# Altium PCB WorldClock.PcbDoc (part 9 of 13)
Units mil, origin at the board's own origin, x right, y up, seen from the top; angles counter-clockwise.
Board outline 3700 x 3850 mil, 2 copper layers (Top Layer, Bottom Layer); 227 components, 134 nets, 1324 pads, 248 vias.
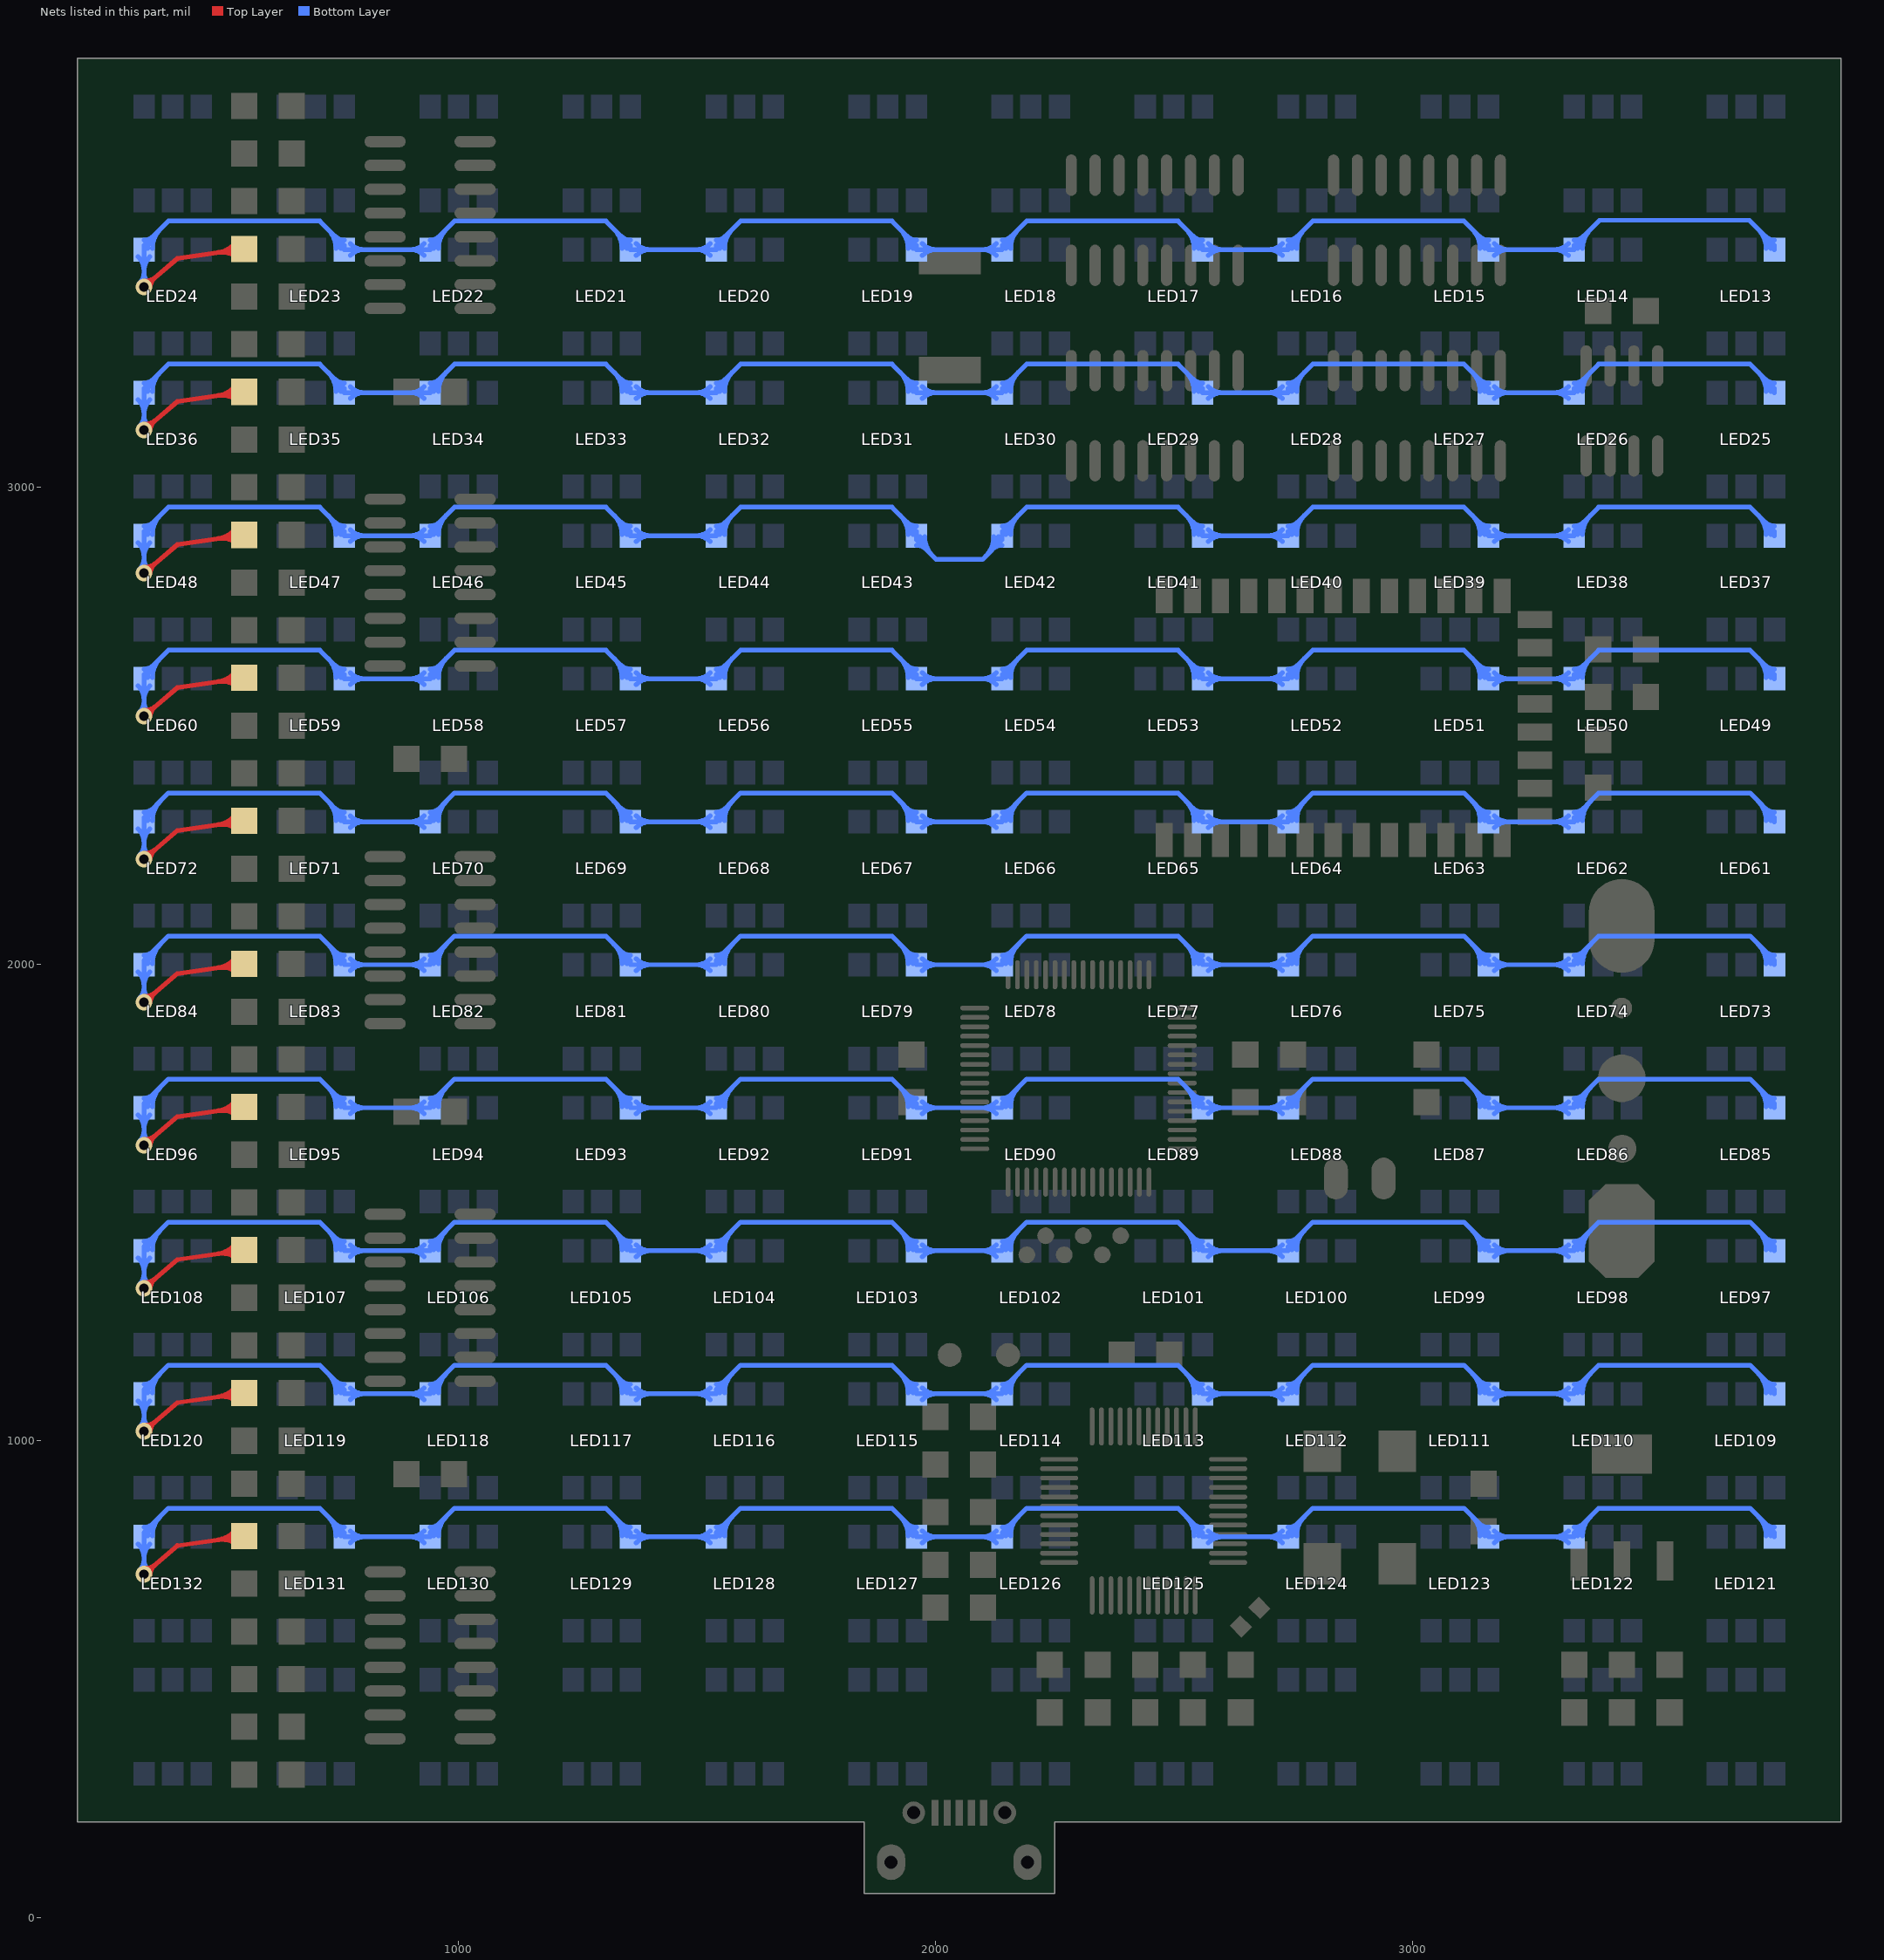
[diagram p9: the nets of this part, all layers, seen from the top]

## Via types
v1: diameter 35, hole 20, Top Layer to Bottom Layer, tented both sides, 213 vias
v2: diameter 24, hole 12, Top Layer to Bottom Layer, tented both sides, 35 vias

## Nets (pads, with @x,y where several pads share a name; then routed paths per layer and width w, separated by ;. In a path a pad name is that pad's centre, name@x,y a point inside that pad or via, vN(x,y) a via of type N, cw(c..) or ccw(c..) an arc to the next point about the centre after c; other vN are vias at no path point) (continued)
G2: LED13.3 LED14.1 LED15.3 LED16.1 LED17.3 LED18.1 LED19.3 LED20.1 LED21.3 LED22.1 LED23.3 LED24.1 R13.1 | length 6161.8
  Top Layer w10: v1@340.96,3432.46 ccw(c343.27,3462.55) 362.91,3439.64 ccw(c382.55,3416.73) v1@352.46,3419.04 ; v1@343,3420.5 v1(340,3420) 410,3480 R13.1@550,3500 ; R13.1@532,3513.5 cw(c488.54,3546.09) 496.23,3492.32 cw(c503.91,3438.54) R13.1@536.5,3482 ; R13.1@540,3507.5 cw(c515.86,3525.61) 520.13,3495.73 cw(c524.39,3465.86) R13.1@542.5,3490
  Bottom Layer w10: LED24.1@327.63,3483.55 cw(c297.75,3453.68) 340,3453.68 cw(c382.25,3453.68) LED24.1@352.37,3483.55 ; v1@331.16,3428.84 ccw(c309.82,3450.18) 340,3450.18 ccw(c370.18,3450.18) v1@348.84,3428.84 ; v1(340,3420) LED24.1@340,3498.43 340,3507.14 391.29,3558.43 708.71,3558.43 760,3507.14 LED23.3@760,3498.43 LED22.1@940,3498.43 940,3507.14 991.29,3558.43 1308.71,3558.43 1360,3507.14 LED21.3@1360,3498.43 LED20.1@1540,3498.43 1540,3507.14 1591.29,3558.43 1908.71,3558.43 1960,3507.14 LED19.3@1960,3498.43 LED18.1@2140,3498.43 2140,3507.14 2191.29,3558.43 2508.71,3558.43 2560,3507.14 LED17.3@2560,3498.43 LED16.1@2740,3498.43 2740,3507.14 2791.29,3558.43 3108.71,3558.43 3160,3507.14 LED15.3@3160,3498.43 LED14.1@3340,3498.43 3340,3507.14 3392.86,3560 3707.14,3560 3760,3507.14 LED13.3@3760,3498.43 ; LED24.1@340,3518.43 ccw(c340,3545.67) 359.27,3526.41 ; LED24.1@347.5,3500.93 cw(c380.61,3500.93) 357.2,3524.34 ; LED24.1@357.5,3500.93 cw(c414.75,3500.93) 374.27,3541.41 ; 725.73,3541.41 cw(c685.25,3500.93) LED23.3@742.5,3500.93 ; 740.73,3526.41 ccw(c760,3545.67) LED23.3@760,3518.43 ; 742.8,3524.34 cw(c719.39,3500.93) LED23.3@752.5,3500.93 ; LED23.3@772.37,3486.05 cw(c802.25,3456.18) 802.25,3498.43 cw(c802.25,3540.67) LED23.3@772.37,3510.8 ; LED22.1@927.63,3486.05 ccw(c897.75,3456.18) 897.75,3498.43 ccw(c897.75,3540.67) LED22.1@927.63,3510.8 ; LED22.1@940,3518.43 ccw(c940,3545.67) 959.27,3526.41 ; LED22.1@947.5,3500.93 cw(c980.61,3500.93) 957.2,3524.34 ; LED22.1@957.5,3500.93 cw(c1014.75,3500.93) 974.27,3541.41 ; 1325.73,3541.41 cw(c1285.25,3500.93) LED21.3@1342.5,3500.93 ; 1340.73,3526.41 ccw(c1360,3545.67) LED21.3@1360,3518.43 ; 1342.8,3524.34 cw(c1319.39,3500.93) LED21.3@1352.5,3500.93 ; LED21.3@1372.37,3486.05 cw(c1402.25,3456.18) 1402.25,3498.43 cw(c1402.25,3540.67) LED21.3@1372.37,3510.8 ; LED20.1@1527.63,3486.05 ccw(c1497.75,3456.18) 1497.75,3498.43 ccw(c1497.75,3540.67) LED20.1@1527.63,3510.8 ; LED20.1@1540,3518.43 ccw(c1540,3545.67) 1559.27,3526.41 ; LED20.1@1547.5,3500.93 cw(c1580.61,3500.93) 1557.2,3524.34 ; LED20.1@1557.5,3500.93 cw(c1614.75,3500.93) 1574.27,3541.41 ; 1925.73,3541.41 cw(c1885.25,3500.93) LED19.3@1942.5,3500.93 ; 1940.73,3526.41 ccw(c1960,3545.67) LED19.3@1960,3518.43 ; 1942.8,3524.34 cw(c1919.39,3500.93) LED19.3@1952.5,3500.93 ; LED19.3@1972.37,3486.05 cw(c2002.25,3456.18) 2002.25,3498.43 cw(c2002.25,3540.67) LED19.3@1972.37,3510.8 ; LED18.1@2127.63,3486.05 ccw(c2097.75,3456.18) 2097.75,3498.43 ccw(c2097.75,3540.67) LED18.1@2127.63,3510.8 ; LED18.1@2140,3518.43 ccw(c2140,3545.67) 2159.27,3526.41 ; LED18.1@2147.5,3500.93 cw(c2180.61,3500.93) 2157.2,3524.34 ; LED18.1@2157.5,3500.93 cw(c2214.75,3500.93) 2174.27,3541.41 ; 2525.73,3541.41 cw(c2485.25,3500.93) LED17.3@2542.5,3500.93 ; 2540.73,3526.41 ccw(c2560,3545.67) LED17.3@2560,3518.43 ; 2542.8,3524.34 cw(c2519.39,3500.93) LED17.3@2552.5,3500.93 ; LED17.3@2572.37,3486.05 cw(c2602.25,3456.18) 2602.25,3498.43 cw(c2602.25,3540.67) LED17.3@2572.37,3510.8 ; LED16.1@2727.63,3486.05 ccw(c2697.75,3456.18) 2697.75,3498.43 ccw(c2697.75,3540.67) LED16.1@2727.63,3510.8 ; LED16.1@2740,3518.43 ccw(c2740,3545.67) 2759.27,3526.41 ; LED16.1@2747.5,3500.93 cw(c2780.61,3500.93) 2757.2,3524.34 ; LED16.1@2757.5,3500.93 cw(c2814.75,3500.93) 2774.27,3541.41 ; 3125.73,3541.41 cw(c3085.25,3500.93) LED15.3@3142.5,3500.93 ; 3140.73,3526.41 ccw(c3160,3545.67) LED15.3@3160,3518.43 ; 3142.8,3524.34 cw(c3119.39,3500.93) LED15.3@3152.5,3500.93 ; LED15.3@3172.37,3486.05 cw(c3202.25,3456.18) 3202.25,3498.43 cw(c3202.25,3540.67) LED15.3@3172.37,3510.8 ; LED14.1@3327.63,3486.05 ccw(c3297.75,3456.18) 3297.75,3498.43 ccw(c3297.75,3540.67) LED14.1@3327.63,3510.8 ; LED14.1@3340,3518.43 ccw(c3340,3545.67) 3359.27,3526.41 ; LED14.1@3347.5,3500.93 cw(c3380.61,3500.93) 3357.2,3524.34 ; LED14.1@3357.5,3500.93 cw(c3414.75,3500.93) 3374.27,3541.41 ; 3725.73,3541.41 cw(c3685.25,3500.93) LED13.3@3742.5,3500.93 ; 3740.73,3526.41 ccw(c3760,3545.67) LED13.3@3760,3518.43 ; 3742.8,3524.34 cw(c3719.39,3500.93) LED13.3@3752.5,3500.93
G3: LED25.3 LED26.1 LED27.3 LED28.1 LED29.3 LED30.1 LED31.3 LED32.1 LED33.3 LED34.1 LED35.3 LED36.1 R16.1 | length 6157.5
  Top Layer w10: v1(340,3120) 410,3180 R16.1@550,3200 ; v1@340.96,3132.46 ccw(c343.27,3162.55) 362.91,3139.64 ccw(c382.55,3116.73) v1@352.46,3119.04 ; R16.1@532,3213.5 cw(c488.54,3246.09) 496.23,3192.32 cw(c503.91,3138.54) R16.1@536.5,3182 ; R16.1@540,3207.5 cw(c515.86,3225.61) 520.13,3195.73 cw(c524.39,3165.86) R16.1@542.5,3190
  Bottom Layer w10: LED36.1@327.63,3183.55 cw(c297.75,3153.68) 340,3153.68 cw(c382.25,3153.68) LED36.1@352.37,3183.55 ; v1@331.16,3128.84 ccw(c309.82,3150.18) 340,3150.18 ccw(c370.18,3150.18) v1@348.84,3128.84 ; v1(340,3120) LED36.1@340,3198.43 340,3207.14 391.29,3258.43 708.71,3258.43 760,3207.14 LED35.3@760,3198.43 LED34.1@940,3198.43 940,3207.14 991.29,3258.43 1308.71,3258.43 1360,3207.14 LED33.3@1360,3198.43 LED32.1@1540,3198.43 1540,3207.14 1591.29,3258.43 1908.71,3258.43 1960,3207.14 LED31.3@1960,3198.43 LED30.1@2140,3198.43 2140,3207.14 2191.29,3258.43 2508.71,3258.43 2560,3207.14 LED29.3@2560,3198.43 LED28.1@2740,3198.43 2740,3207.14 2791.29,3258.43 3108.71,3258.43 3160,3207.14 LED27.3@3160,3198.43 LED26.1@3340,3198.43 3340,3207.14 3391.29,3258.43 3708.71,3258.43 3760,3207.14 LED25.3@3760,3198.43 ; LED36.1@340,3218.43 ccw(c340,3245.67) 359.27,3226.41 ; LED36.1@347.5,3200.93 cw(c380.61,3200.93) 357.2,3224.34 ; LED36.1@357.5,3200.93 cw(c414.75,3200.93) 374.27,3241.41 ; 725.73,3241.41 cw(c685.25,3200.93) LED35.3@742.5,3200.93 ; 740.73,3226.41 ccw(c760,3245.67) LED35.3@760,3218.43 ; 742.8,3224.34 cw(c719.39,3200.93) LED35.3@752.5,3200.93 ; LED35.3@772.37,3186.05 cw(c802.25,3156.18) 802.25,3198.43 cw(c802.25,3240.67) LED35.3@772.37,3210.8 ; LED34.1@927.63,3186.05 ccw(c897.75,3156.18) 897.75,3198.43 ccw(c897.75,3240.67) LED34.1@927.63,3210.8 ; LED34.1@940,3218.43 ccw(c940,3245.67) 959.27,3226.41 ; LED34.1@947.5,3200.93 cw(c980.61,3200.93) 957.2,3224.34 ; LED34.1@957.5,3200.93 cw(c1014.75,3200.93) 974.27,3241.41 ; 1325.73,3241.41 cw(c1285.25,3200.93) LED33.3@1342.5,3200.93 ; 1340.73,3226.41 ccw(c1360,3245.67) LED33.3@1360,3218.43 ; 1342.8,3224.34 cw(c1319.39,3200.93) LED33.3@1352.5,3200.93 ; LED33.3@1372.37,3186.05 cw(c1402.25,3156.18) 1402.25,3198.43 cw(c1402.25,3240.67) LED33.3@1372.37,3210.8 ; LED32.1@1527.63,3186.05 ccw(c1497.75,3156.18) 1497.75,3198.43 ccw(c1497.75,3240.67) LED32.1@1527.63,3210.8 ; LED32.1@1540,3218.43 ccw(c1540,3245.67) 1559.27,3226.41 ; LED32.1@1547.5,3200.93 cw(c1580.61,3200.93) 1557.2,3224.34 ; LED32.1@1557.5,3200.93 cw(c1614.75,3200.93) 1574.27,3241.41 ; 1925.73,3241.41 cw(c1885.25,3200.93) LED31.3@1942.5,3200.93 ; 1940.73,3226.41 ccw(c1960,3245.67) LED31.3@1960,3218.43 ; 1942.8,3224.34 cw(c1919.39,3200.93) LED31.3@1952.5,3200.93 ; LED31.3@1972.37,3186.05 cw(c2002.25,3156.18) 2002.25,3198.43 cw(c2002.25,3240.67) LED31.3@1972.37,3210.8 ; LED30.1@2127.63,3186.05 ccw(c2097.75,3156.18) 2097.75,3198.43 ccw(c2097.75,3240.67) LED30.1@2127.63,3210.8 ; LED30.1@2140,3218.43 ccw(c2140,3245.67) 2159.27,3226.41 ; LED30.1@2147.5,3200.93 cw(c2180.61,3200.93) 2157.2,3224.34 ; LED30.1@2157.5,3200.93 cw(c2214.75,3200.93) 2174.27,3241.41 ; 2525.73,3241.41 cw(c2485.25,3200.93) LED29.3@2542.5,3200.93 ; 2540.73,3226.41 ccw(c2560,3245.67) LED29.3@2560,3218.43 ; 2542.8,3224.34 cw(c2519.39,3200.93) LED29.3@2552.5,3200.93 ; LED29.3@2572.37,3186.05 cw(c2602.25,3156.18) 2602.25,3198.43 cw(c2602.25,3240.67) LED29.3@2572.37,3210.8 ; LED28.1@2727.63,3186.05 ccw(c2697.75,3156.18) 2697.75,3198.43 ccw(c2697.75,3240.67) LED28.1@2727.63,3210.8 ; LED28.1@2740,3218.43 ccw(c2740,3245.67) 2759.27,3226.41 ; LED28.1@2747.5,3200.93 cw(c2780.61,3200.93) 2757.2,3224.34 ; LED28.1@2757.5,3200.93 cw(c2814.75,3200.93) 2774.27,3241.41 ; 3125.73,3241.41 cw(c3085.25,3200.93) LED27.3@3142.5,3200.93 ; 3140.73,3226.41 ccw(c3160,3245.67) LED27.3@3160,3218.43 ; 3142.8,3224.34 cw(c3119.39,3200.93) LED27.3@3152.5,3200.93 ; LED27.3@3172.37,3186.05 cw(c3202.25,3156.18) 3202.25,3198.43 cw(c3202.25,3240.67) LED27.3@3172.37,3210.8 ; LED26.1@3327.63,3186.05 ccw(c3297.75,3156.18) 3297.75,3198.43 ccw(c3297.75,3240.67) LED26.1@3327.63,3210.8 ; LED26.1@3340,3218.43 ccw(c3340,3245.67) 3359.27,3226.41 ; LED26.1@3347.5,3200.93 cw(c3380.61,3200.93) 3357.2,3224.34 ; LED26.1@3357.5,3200.93 cw(c3414.75,3200.93) 3374.27,3241.41 ; 3725.73,3241.41 cw(c3685.25,3200.93) LED25.3@3742.5,3200.93 ; 3740.73,3226.41 ccw(c3760,3245.67) LED25.3@3760,3218.43 ; 3742.8,3224.34 cw(c3719.39,3200.93) LED25.3@3752.5,3200.93
G4: LED37.3 LED38.1 LED39.3 LED40.1 LED41.3 LED42.1 LED43.3 LED44.1 LED45.3 LED46.1 LED47.3 LED48.1 R18.1 | length 6259.7
  Top Layer w10: v1(340,2820) 410,2880 R18.1@550,2900 ; v1@340.96,2832.46 ccw(c343.27,2862.55) 362.91,2839.64 ccw(c382.55,2816.73) v1@352.46,2819.04 ; R18.1@532,2913.5 cw(c488.54,2946.09) 496.23,2892.32 cw(c503.91,2838.54) R18.1@536.5,2882 ; R18.1@540,2907.5 cw(c515.86,2925.61) 520.13,2895.73 cw(c524.39,2865.86) R18.1@542.5,2890
  Bottom Layer w10: LED48.1@327.63,2883.55 cw(c297.75,2853.68) 340,2853.68 cw(c382.25,2853.68) LED48.1@352.37,2883.55 ; v1@331.16,2828.84 ccw(c309.82,2850.18) 340,2850.18 ccw(c370.18,2850.18) v1@348.84,2828.84 ; v1(340,2820) LED48.1@340,2898.43 340,2907.14 391.29,2958.43 708.71,2958.43 760,2907.14 LED47.3@760,2898.43 LED46.1@940,2898.43 940,2907.14 991.29,2958.43 1308.71,2958.43 1360,2907.14 LED45.3@1360,2898.43 LED44.1@1540,2898.43 1540,2907.14 1591.29,2958.43 1908.71,2958.43 1960,2907.14 LED43.3@1960,2898.43 1960,2890 2001.57,2848.43 2098.43,2848.43 2140,2890 LED42.1@2140,2898.43 2140,2907.14 2191.29,2958.43 2508.71,2958.43 2560,2907.14 LED41.3@2560,2898.43 LED40.1@2740,2898.43 2740,2907.14 2791.29,2958.43 3108.71,2958.43 3160,2907.14 LED39.3@3160,2898.43 LED38.1@3340,2898.43 3340,2907.14 3391.29,2958.43 3708.71,2958.43 3760,2907.14 LED37.3@3760,2898.43 ; LED48.1@340,2918.43 ccw(c340,2945.67) 359.27,2926.41 ; LED48.1@347.5,2900.93 cw(c380.61,2900.93) 357.2,2924.34 ; LED48.1@357.5,2900.93 cw(c414.75,2900.93) 374.27,2941.41 ; 725.73,2941.41 cw(c685.25,2900.93) LED47.3@742.5,2900.93 ; 740.73,2926.41 ccw(c760,2945.67) LED47.3@760,2918.43 ; 742.8,2924.34 cw(c719.39,2900.93) LED47.3@752.5,2900.93 ; LED47.3@772.37,2886.05 cw(c802.25,2856.18) 802.25,2898.43 cw(c802.25,2940.67) LED47.3@772.37,2910.8 ; LED46.1@927.63,2886.05 ccw(c897.75,2856.18) 897.75,2898.43 ccw(c897.75,2940.67) LED46.1@927.63,2910.8 ; LED46.1@940,2918.43 ccw(c940,2945.67) 959.27,2926.41 ; LED46.1@947.5,2900.93 cw(c980.61,2900.93) 957.2,2924.34 ; LED46.1@957.5,2900.93 cw(c1014.75,2900.93) 974.27,2941.41 ; 1325.73,2941.41 cw(c1285.25,2900.93) LED45.3@1342.5,2900.93 ; 1340.73,2926.41 ccw(c1360,2945.67) LED45.3@1360,2918.43 ; 1342.8,2924.34 cw(c1319.39,2900.93) LED45.3@1352.5,2900.93 ; LED45.3@1372.37,2886.05 cw(c1402.25,2856.18) 1402.25,2898.43 cw(c1402.25,2940.67) LED45.3@1372.37,2910.8 ; LED44.1@1527.63,2886.05 ccw(c1497.75,2856.18) 1497.75,2898.43 ccw(c1497.75,2940.67) LED44.1@1527.63,2910.8 ; LED44.1@1540,2918.43 ccw(c1540,2945.67) 1559.27,2926.41 ; LED44.1@1547.5,2900.93 cw(c1580.61,2900.93) 1557.2,2924.34 ; LED44.1@1557.5,2900.93 cw(c1614.75,2900.93) 1574.27,2941.41 ; 1925.73,2941.41 cw(c1885.25,2900.93) LED43.3@1942.5,2900.93 ; 1940.73,2926.41 ccw(c1960,2945.67) LED43.3@1960,2918.43 ; 1942.8,2924.34 cw(c1919.39,2900.93) LED43.3@1952.5,2900.93 ; LED43.3@1960,2878.43 cw(c1960,2850.48) 1979.76,2870.24 ; LED43.3@1967.5,2895.93 ccw(c1999.91,2895.93) 1976.99,2873.01 ; LED43.3@1977.5,2895.93 ccw(c2034.05,2895.93) 1994.06,2855.94 ; 2105.94,2855.94 ccw(c2065.95,2895.93) LED42.1@2122.5,2895.93 ; 2120.24,2870.24 cw(c2140,2850.48) LED42.1@2140,2878.43 ; 2123.01,2873.01 ccw(c2100.09,2895.93) LED42.1@2132.5,2895.93 ; LED42.1@2140,2918.43 ccw(c2140,2945.67) 2159.27,2926.41 ; LED42.1@2147.5,2900.93 cw(c2180.61,2900.93) 2157.2,2924.34 ; LED42.1@2157.5,2900.93 cw(c2214.75,2900.93) 2174.27,2941.41 ; 2525.73,2941.41 cw(c2485.25,2900.93) LED41.3@2542.5,2900.93 ; 2540.73,2926.41 ccw(c2560,2945.67) LED41.3@2560,2918.43 ; 2542.8,2924.34 cw(c2519.39,2900.93) LED41.3@2552.5,2900.93 ; LED41.3@2572.37,2886.05 cw(c2602.25,2856.18) 2602.25,2898.43 cw(c2602.25,2940.67) LED41.3@2572.37,2910.8 ; LED40.1@2727.63,2886.05 ccw(c2697.75,2856.18) 2697.75,2898.43 ccw(c2697.75,2940.67) LED40.1@2727.63,2910.8 ; LED40.1@2740,2918.43 ccw(c2740,2945.67) 2759.27,2926.41 ; LED40.1@2747.5,2900.93 cw(c2780.61,2900.93) 2757.2,2924.34 ; LED40.1@2757.5,2900.93 cw(c2814.75,2900.93) 2774.27,2941.41 ; 3125.73,2941.41 cw(c3085.25,2900.93) LED39.3@3142.5,2900.93 ; 3140.73,2926.41 ccw(c3160,2945.67) LED39.3@3160,2918.43 ; 3142.8,2924.34 cw(c3119.39,2900.93) LED39.3@3152.5,2900.93 ; LED39.3@3172.37,2886.05 cw(c3202.25,2856.18) 3202.25,2898.43 cw(c3202.25,2940.67) LED39.3@3172.37,2910.8 ; LED38.1@3327.63,2886.05 ccw(c3297.75,2856.18) 3297.75,2898.43 ccw(c3297.75,2940.67) LED38.1@3327.63,2910.8 ; LED38.1@3340,2918.43 ccw(c3340,2945.67) 3359.27,2926.41 ; LED38.1@3347.5,2900.93 cw(c3380.61,2900.93) 3357.2,2924.34 ; LED38.1@3357.5,2900.93 cw(c3414.75,2900.93) 3374.27,2941.41 ; 3725.73,2941.41 cw(c3685.25,2900.93) LED37.3@3742.5,2900.93 ; 3740.73,2926.41 ccw(c3760,2945.67) LED37.3@3760,2918.43 ; 3742.8,2924.34 cw(c3719.39,2900.93) LED37.3@3752.5,2900.93
G5: LED49.3 LED50.1 LED51.3 LED52.1 LED53.3 LED54.1 LED55.3 LED56.1 LED57.3 LED58.1 LED59.3 LED60.1 R22.1 | length 6157.5
  Top Layer w10: v1(340,2520) 410,2580 R22.1@550,2600 ; v1@340.96,2532.46 ccw(c343.27,2562.55) 362.91,2539.64 ccw(c382.55,2516.73) v1@352.46,2519.04 ; R22.1@532,2613.5 cw(c488.54,2646.09) 496.23,2592.32 cw(c503.91,2538.54) R22.1@536.5,2582 ; R22.1@540,2607.5 cw(c515.86,2625.61) 520.13,2595.73 cw(c524.39,2565.86) R22.1@542.5,2590
  Bottom Layer w10: LED60.1@327.63,2583.55 cw(c297.75,2553.68) 340,2553.68 cw(c382.25,2553.68) LED60.1@352.37,2583.55 ; v1@331.16,2528.84 ccw(c309.82,2550.18) 340,2550.18 ccw(c370.18,2550.18) v1@348.84,2528.84 ; v1(340,2520) LED60.1@340,2598.43 340,2607.14 391.29,2658.43 708.71,2658.43 760,2607.14 LED59.3@760,2598.43 LED58.1@940,2598.43 940,2607.14 991.29,2658.43 1308.71,2658.43 1360,2607.14 LED57.3@1360,2598.43 LED56.1@1540,2598.43 1540,2607.14 1591.29,2658.43 1908.71,2658.43 1960,2607.14 LED55.3@1960,2598.43 LED54.1@2140,2598.43 2140,2607.14 2191.29,2658.43 2508.71,2658.43 2560,2607.14 LED53.3@2560,2598.43 LED52.1@2740,2598.43 2740,2607.14 2791.29,2658.43 3108.71,2658.43 3160,2607.14 LED51.3@3160,2598.43 LED50.1@3340,2598.43 3340,2607.14 3391.29,2658.43 3708.71,2658.43 3760,2607.14 LED49.3@3760,2598.43 ; LED60.1@340,2618.43 ccw(c340,2645.67) 359.27,2626.41 ; LED60.1@347.5,2600.93 cw(c380.61,2600.93) 357.2,2624.34 ; LED60.1@357.5,2600.93 cw(c414.75,2600.93) 374.27,2641.41 ; 725.73,2641.41 cw(c685.25,2600.93) LED59.3@742.5,2600.93 ; 740.73,2626.41 ccw(c760,2645.67) LED59.3@760,2618.43 ; 742.8,2624.34 cw(c719.39,2600.93) LED59.3@752.5,2600.93 ; LED59.3@772.37,2586.05 cw(c802.25,2556.18) 802.25,2598.43 cw(c802.25,2640.67) LED59.3@772.37,2610.8 ; LED58.1@927.63,2586.05 ccw(c897.75,2556.18) 897.75,2598.43 ccw(c897.75,2640.67) LED58.1@927.63,2610.8 ; LED58.1@940,2618.43 ccw(c940,2645.67) 959.27,2626.41 ; LED58.1@947.5,2600.93 cw(c980.61,2600.93) 957.2,2624.34 ; LED58.1@957.5,2600.93 cw(c1014.75,2600.93) 974.27,2641.41 ; 1325.73,2641.41 cw(c1285.25,2600.93) LED57.3@1342.5,2600.93 ; 1340.73,2626.41 ccw(c1360,2645.67) LED57.3@1360,2618.43 ; 1342.8,2624.34 cw(c1319.39,2600.93) LED57.3@1352.5,2600.93 ; LED57.3@1372.37,2586.05 cw(c1402.25,2556.18) 1402.25,2598.43 cw(c1402.25,2640.67) LED57.3@1372.37,2610.8 ; LED56.1@1527.63,2586.05 ccw(c1497.75,2556.18) 1497.75,2598.43 ccw(c1497.75,2640.67) LED56.1@1527.63,2610.8 ; LED56.1@1540,2618.43 ccw(c1540,2645.67) 1559.27,2626.41 ; LED56.1@1547.5,2600.93 cw(c1580.61,2600.93) 1557.2,2624.34 ; LED56.1@1557.5,2600.93 cw(c1614.75,2600.93) 1574.27,2641.41 ; 1925.73,2641.41 cw(c1885.25,2600.93) LED55.3@1942.5,2600.93 ; 1940.73,2626.41 ccw(c1960,2645.67) LED55.3@1960,2618.43 ; 1942.8,2624.34 cw(c1919.39,2600.93) LED55.3@1952.5,2600.93 ; LED55.3@1972.37,2586.05 cw(c2002.25,2556.18) 2002.25,2598.43 cw(c2002.25,2640.67) LED55.3@1972.37,2610.8 ; LED54.1@2127.63,2586.05 ccw(c2097.75,2556.18) 2097.75,2598.43 ccw(c2097.75,2640.67) LED54.1@2127.63,2610.8 ; LED54.1@2140,2618.43 ccw(c2140,2645.67) 2159.27,2626.41 ; LED54.1@2147.5,2600.93 cw(c2180.61,2600.93) 2157.2,2624.34 ; LED54.1@2157.5,2600.93 cw(c2214.75,2600.93) 2174.27,2641.41 ; 2525.73,2641.41 cw(c2485.25,2600.93) LED53.3@2542.5,2600.93 ; 2540.73,2626.41 ccw(c2560,2645.67) LED53.3@2560,2618.43 ; 2542.8,2624.34 cw(c2519.39,2600.93) LED53.3@2552.5,2600.93 ; LED53.3@2572.37,2586.05 cw(c2602.25,2556.18) 2602.25,2598.43 cw(c2602.25,2640.67) LED53.3@2572.37,2610.8 ; LED52.1@2727.63,2586.05 ccw(c2697.75,2556.18) 2697.75,2598.43 ccw(c2697.75,2640.67) LED52.1@2727.63,2610.8 ; LED52.1@2740,2618.43 ccw(c2740,2645.67) 2759.27,2626.41 ; LED52.1@2747.5,2600.93 cw(c2780.61,2600.93) 2757.2,2624.34 ; LED52.1@2757.5,2600.93 cw(c2814.75,2600.93) 2774.27,2641.41 ; 3125.73,2641.41 cw(c3085.25,2600.93) LED51.3@3142.5,2600.93 ; 3140.73,2626.41 ccw(c3160,2645.67) LED51.3@3160,2618.43 ; 3142.8,2624.34 cw(c3119.39,2600.93) LED51.3@3152.5,2600.93 ; LED51.3@3172.37,2586.05 cw(c3202.25,2556.18) 3202.25,2598.43 cw(c3202.25,2640.67) LED51.3@3172.37,2610.8 ; LED50.1@3327.63,2586.05 ccw(c3297.75,2556.18) 3297.75,2598.43 ccw(c3297.75,2640.67) LED50.1@3327.63,2610.8 ; LED50.1@3340,2618.43 ccw(c3340,2645.67) 3359.27,2626.41 ; LED50.1@3347.5,2600.93 cw(c3380.61,2600.93) 3357.2,2624.34 ; LED50.1@3357.5,2600.93 cw(c3414.75,2600.93) 3374.27,2641.41 ; 3725.73,2641.41 cw(c3685.25,2600.93) LED49.3@3742.5,2600.93 ; 3740.73,2626.41 ccw(c3760,2645.67) LED49.3@3760,2618.43 ; 3742.8,2624.34 cw(c3719.39,2600.93) LED49.3@3752.5,2600.93
G6: LED61.3 LED62.1 LED63.3 LED64.1 LED65.3 LED66.1 LED67.3 LED68.1 LED69.3 LED70.1 LED71.3 LED72.1 R25.1 | length 6157.5
  Top Layer w10: v1(340,2220) 410,2280 R25.1@550,2300 ; v1@340.96,2232.46 ccw(c343.27,2262.55) 362.91,2239.64 ccw(c382.55,2216.73) v1@352.46,2219.04 ; R25.1@532,2313.5 cw(c488.54,2346.09) 496.23,2292.32 cw(c503.91,2238.54) R25.1@536.5,2282 ; R25.1@540,2307.5 cw(c515.86,2325.61) 520.13,2295.73 cw(c524.39,2265.86) R25.1@542.5,2290
  Bottom Layer w10: LED72.1@327.63,2283.55 cw(c297.75,2253.68) 340,2253.68 cw(c382.25,2253.68) LED72.1@352.37,2283.55 ; v1@331.16,2228.84 ccw(c309.82,2250.18) 340,2250.18 ccw(c370.18,2250.18) v1@348.84,2228.84 ; v1(340,2220) LED72.1@340,2298.43 340,2307.14 391.29,2358.43 708.71,2358.43 760,2307.14 LED71.3@760,2298.43 LED70.1@940,2298.43 940,2307.14 991.29,2358.43 1308.71,2358.43 1360,2307.14 LED69.3@1360,2298.43 LED68.1@1540,2298.43 1540,2307.14 1591.29,2358.43 1908.71,2358.43 1960,2307.14 LED67.3@1960,2298.43 LED66.1@2140,2298.43 2140,2307.14 2191.29,2358.43 2508.71,2358.43 2560,2307.14 LED65.3@2560,2298.43 LED64.1@2740,2298.43 2740,2307.14 2791.29,2358.43 3108.71,2358.43 3160,2307.14 LED63.3@3160,2298.43 LED62.1@3340,2298.43 3340,2307.14 3391.29,2358.43 3708.71,2358.43 3760,2307.14 LED61.3@3760,2298.43 ; LED72.1@340,2318.43 ccw(c340,2345.67) 359.27,2326.41 ; LED72.1@347.5,2300.93 cw(c380.61,2300.93) 357.2,2324.34 ; LED72.1@357.5,2300.93 cw(c414.75,2300.93) 374.27,2341.41 ; 725.73,2341.41 cw(c685.25,2300.93) LED71.3@742.5,2300.93 ; 740.73,2326.41 ccw(c760,2345.67) LED71.3@760,2318.43 ; 742.8,2324.34 cw(c719.39,2300.93) LED71.3@752.5,2300.93 ; LED71.3@772.37,2286.05 cw(c802.25,2256.18) 802.25,2298.43 cw(c802.25,2340.67) LED71.3@772.37,2310.8 ; LED70.1@927.63,2286.05 ccw(c897.75,2256.18) 897.75,2298.43 ccw(c897.75,2340.67) LED70.1@927.63,2310.8 ; LED70.1@940,2318.43 ccw(c940,2345.67) 959.27,2326.41 ; LED70.1@947.5,2300.93 cw(c980.61,2300.93) 957.2,2324.34 ; LED70.1@957.5,2300.93 cw(c1014.75,2300.93) 974.27,2341.41 ; 1325.73,2341.41 cw(c1285.25,2300.93) LED69.3@1342.5,2300.93 ; 1340.73,2326.41 ccw(c1360,2345.67) LED69.3@1360,2318.43 ; 1342.8,2324.34 cw(c1319.39,2300.93) LED69.3@1352.5,2300.93 ; LED69.3@1372.37,2286.05 cw(c1402.25,2256.18) 1402.25,2298.43 cw(c1402.25,2340.67) LED69.3@1372.37,2310.8 ; LED68.1@1527.63,2286.05 ccw(c1497.75,2256.18) 1497.75,2298.43 ccw(c1497.75,2340.67) LED68.1@1527.63,2310.8 ; LED68.1@1540,2318.43 ccw(c1540,2345.67) 1559.27,2326.41 ; LED68.1@1547.5,2300.93 cw(c1580.61,2300.93) 1557.2,2324.34 ; LED68.1@1557.5,2300.93 cw(c1614.75,2300.93) 1574.27,2341.41 ; 1925.73,2341.41 cw(c1885.25,2300.93) LED67.3@1942.5,2300.93 ; 1940.73,2326.41 ccw(c1960,2345.67) LED67.3@1960,2318.43 ; 1942.8,2324.34 cw(c1919.39,2300.93) LED67.3@1952.5,2300.93 ; LED67.3@1972.37,2286.05 cw(c2002.25,2256.18) 2002.25,2298.43 cw(c2002.25,2340.67) LED67.3@1972.37,2310.8 ; LED66.1@2127.63,2286.05 ccw(c2097.75,2256.18) 2097.75,2298.43 ccw(c2097.75,2340.67) LED66.1@2127.63,2310.8 ; LED66.1@2140,2318.43 ccw(c2140,2345.67) 2159.27,2326.41 ; LED66.1@2147.5,2300.93 cw(c2180.61,2300.93) 2157.2,2324.34 ; LED66.1@2157.5,2300.93 cw(c2214.75,2300.93) 2174.27,2341.41 ; 2525.73,2341.41 cw(c2485.25,2300.93) LED65.3@2542.5,2300.93 ; 2540.73,2326.41 ccw(c2560,2345.67) LED65.3@2560,2318.43 ; 2542.8,2324.34 cw(c2519.39,2300.93) LED65.3@2552.5,2300.93 ; LED65.3@2572.37,2286.05 cw(c2602.25,2256.18) 2602.25,2298.43 cw(c2602.25,2340.67) LED65.3@2572.37,2310.8 ; LED64.1@2727.63,2286.05 ccw(c2697.75,2256.18) 2697.75,2298.43 ccw(c2697.75,2340.67) LED64.1@2727.63,2310.8 ; LED64.1@2740,2318.43 ccw(c2740,2345.67) 2759.27,2326.41 ; LED64.1@2747.5,2300.93 cw(c2780.61,2300.93) 2757.2,2324.34 ; LED64.1@2757.5,2300.93 cw(c2814.75,2300.93) 2774.27,2341.41 ; 3125.73,2341.41 cw(c3085.25,2300.93) LED63.3@3142.5,2300.93 ; 3140.73,2326.41 ccw(c3160,2345.67) LED63.3@3160,2318.43 ; 3142.8,2324.34 cw(c3119.39,2300.93) LED63.3@3152.5,2300.93 ; LED63.3@3172.37,2286.05 cw(c3202.25,2256.18) 3202.25,2298.43 cw(c3202.25,2340.67) LED63.3@3172.37,2310.8 ; LED62.1@3327.63,2286.05 ccw(c3297.75,2256.18) 3297.75,2298.43 ccw(c3297.75,2340.67) LED62.1@3327.63,2310.8 ; LED62.1@3340,2318.43 ccw(c3340,2345.67) 3359.27,2326.41 ; LED62.1@3347.5,2300.93 cw(c3380.61,2300.93) 3357.2,2324.34 ; LED62.1@3357.5,2300.93 cw(c3414.75,2300.93) 3374.27,2341.41 ; 3725.73,2341.41 cw(c3685.25,2300.93) LED61.3@3742.5,2300.93 ; 3740.73,2326.41 ccw(c3760,2345.67) LED61.3@3760,2318.43 ; 3742.8,2324.34 cw(c3719.39,2300.93) LED61.3@3752.5,2300.93
G7: LED73.3 LED74.1 LED75.3 LED76.1 LED77.3 LED78.1 LED79.3 LED80.1 LED81.3 LED82.1 LED83.3 LED84.1 R27.1 | length 6157.5
  Top Layer w10: v1(340,1920) 410,1980 R27.1@550,2000 ; v1@340.96,1932.46 ccw(c343.27,1962.55) 362.91,1939.64 ccw(c382.55,1916.73) v1@352.46,1919.04 ; R27.1@532,2013.5 cw(c488.54,2046.09) 496.23,1992.32 cw(c503.91,1938.54) R27.1@536.5,1982 ; R27.1@540,2007.5 cw(c515.86,2025.61) 520.13,1995.73 cw(c524.39,1965.86) R27.1@542.5,1990
  Bottom Layer w10: LED84.1@327.63,1983.55 cw(c297.75,1953.68) 340,1953.68 cw(c382.25,1953.68) LED84.1@352.37,1983.55 ; v1@331.16,1928.84 ccw(c309.82,1950.18) 340,1950.18 ccw(c370.18,1950.18) v1@348.84,1928.84 ; v1(340,1920) LED84.1@340,1998.43 340,2007.14 391.29,2058.43 708.71,2058.43 760,2007.14 LED83.3@760,1998.43 LED82.1@940,1998.43 940,2007.14 991.29,2058.43 1308.71,2058.43 1360,2007.14 LED81.3@1360,1998.43 LED80.1@1540,1998.43 1540,2007.14 1591.29,2058.43 1908.71,2058.43 1960,2007.14 LED79.3@1960,1998.43 LED78.1@2140,1998.43 2140,2007.14 2191.29,2058.43 2508.71,2058.43 2560,2007.14 LED77.3@2560,1998.43 LED76.1@2740,1998.43 2740,2007.14 2791.29,2058.43 3108.71,2058.43 3160,2007.14 LED75.3@3160,1998.43 LED74.1@3340,1998.43 3340,2007.14 3391.29,2058.43 3708.71,2058.43 3760,2007.14 LED73.3@3760,1998.43 ; LED84.1@340,2018.43 ccw(c340,2045.67) 359.27,2026.41 ; LED84.1@347.5,2000.93 cw(c380.61,2000.93) 357.2,2024.34 ; LED84.1@357.5,2000.93 cw(c414.75,2000.93) 374.27,2041.41 ; 725.73,2041.41 cw(c685.25,2000.93) LED83.3@742.5,2000.93 ; 740.73,2026.41 ccw(c760,2045.67) LED83.3@760,2018.43 ; 742.8,2024.34 cw(c719.39,2000.93) LED83.3@752.5,2000.93 ; LED83.3@772.37,1986.05 cw(c802.25,1956.18) 802.25,1998.43 cw(c802.25,2040.67) LED83.3@772.37,2010.8 ; LED82.1@927.63,1986.05 ccw(c897.75,1956.18) 897.75,1998.43 ccw(c897.75,2040.67) LED82.1@927.63,2010.8 ; LED82.1@940,2018.43 ccw(c940,2045.67) 959.27,2026.41 ; LED82.1@947.5,2000.93 cw(c980.61,2000.93) 957.2,2024.34 ; LED82.1@957.5,2000.93 cw(c1014.75,2000.93) 974.27,2041.41 ; 1325.73,2041.41 cw(c1285.25,2000.93) LED81.3@1342.5,2000.93 ; 1340.73,2026.41 ccw(c1360,2045.67) LED81.3@1360,2018.43 ; 1342.8,2024.34 cw(c1319.39,2000.93) LED81.3@1352.5,2000.93 ; LED81.3@1372.37,1986.05 cw(c1402.25,1956.18) 1402.25,1998.43 cw(c1402.25,2040.67) LED81.3@1372.37,2010.8 ; LED80.1@1527.63,1986.05 ccw(c1497.75,1956.18) 1497.75,1998.43 ccw(c1497.75,2040.67) LED80.1@1527.63,2010.8 ; LED80.1@1540,2018.43 ccw(c1540,2045.67) 1559.27,2026.41 ; LED80.1@1547.5,2000.93 cw(c1580.61,2000.93) 1557.2,2024.34 ; LED80.1@1557.5,2000.93 cw(c1614.75,2000.93) 1574.27,2041.41 ; 1925.73,2041.41 cw(c1885.25,2000.93) LED79.3@1942.5,2000.93 ; 1940.73,2026.41 ccw(c1960,2045.67) LED79.3@1960,2018.43 ; 1942.8,2024.34 cw(c1919.39,2000.93) LED79.3@1952.5,2000.93 ; LED79.3@1972.37,1986.05 cw(c2002.25,1956.18) 2002.25,1998.43 cw(c2002.25,2040.67) LED79.3@1972.37,2010.8 ; LED78.1@2127.63,1986.05 ccw(c2097.75,1956.18) 2097.75,1998.43 ccw(c2097.75,2040.67) LED78.1@2127.63,2010.8 ; LED78.1@2140,2018.43 ccw(c2140,2045.67) 2159.27,2026.41 ; LED78.1@2147.5,2000.93 cw(c2180.61,2000.93) 2157.2,2024.34 ; LED78.1@2157.5,2000.93 cw(c2214.75,2000.93) 2174.27,2041.41 ; 2525.73,2041.41 cw(c2485.25,2000.93) LED77.3@2542.5,2000.93 ; 2540.73,2026.41 ccw(c2560,2045.67) LED77.3@2560,2018.43 ; 2542.8,2024.34 cw(c2519.39,2000.93) LED77.3@2552.5,2000.93 ; LED77.3@2572.37,1986.05 cw(c2602.25,1956.18) 2602.25,1998.43 cw(c2602.25,2040.67) LED77.3@2572.37,2010.8 ; LED76.1@2727.63,1986.05 ccw(c2697.75,1956.18) 2697.75,1998.43 ccw(c2697.75,2040.67) LED76.1@2727.63,2010.8 ; LED76.1@2740,2018.43 ccw(c2740,2045.67) 2759.27,2026.41 ; LED76.1@2747.5,2000.93 cw(c2780.61,2000.93) 2757.2,2024.34 ; LED76.1@2757.5,2000.93 cw(c2814.75,2000.93) 2774.27,2041.41 ; 3125.73,2041.41 cw(c3085.25,2000.93) LED75.3@3142.5,2000.93 ; 3140.73,2026.41 ccw(c3160,2045.67) LED75.3@3160,2018.43 ; 3142.8,2024.34 cw(c3119.39,2000.93) LED75.3@3152.5,2000.93 ; LED75.3@3172.37,1986.05 cw(c3202.25,1956.18) 3202.25,1998.43 cw(c3202.25,2040.67) LED75.3@3172.37,2010.8 ; LED74.1@3327.63,1986.05 ccw(c3297.75,1956.18) 3297.75,1998.43 ccw(c3297.75,2040.67) LED74.1@3327.63,2010.8 ; LED74.1@3340,2018.43 ccw(c3340,2045.67) 3359.27,2026.41 ; LED74.1@3347.5,2000.93 cw(c3380.61,2000.93) 3357.2,2024.34 ; LED74.1@3357.5,2000.93 cw(c3414.75,2000.93) 3374.27,2041.41 ; 3725.73,2041.41 cw(c3685.25,2000.93) LED73.3@3742.5,2000.93 ; 3740.73,2026.41 ccw(c3760,2045.67) LED73.3@3760,2018.43 ; 3742.8,2024.34 cw(c3719.39,2000.93) LED73.3@3752.5,2000.93
G8: LED85.3 LED86.1 LED87.3 LED88.1 LED89.3 LED90.1 LED91.3 LED92.1 LED93.3 LED94.1 LED95.3 LED96.1 R31.1 | length 6157.5
  Top Layer w10: v1(340,1620) 410,1680 R31.1@550,1700 ; v1@340.96,1632.46 ccw(c343.27,1662.55) 362.91,1639.64 ccw(c382.55,1616.73) v1@352.46,1619.04 ; R31.1@532,1713.5 cw(c488.54,1746.09) 496.23,1692.32 cw(c503.91,1638.54) R31.1@536.5,1682 ; R31.1@540,1707.5 cw(c515.86,1725.61) 520.13,1695.73 cw(c524.39,1665.86) R31.1@542.5,1690
  Bottom Layer w10: LED96.1@327.63,1683.55 cw(c297.75,1653.68) 340,1653.68 cw(c382.25,1653.68) LED96.1@352.37,1683.55 ; v1@331.16,1628.84 ccw(c309.82,1650.18) 340,1650.18 ccw(c370.18,1650.18) v1@348.84,1628.84 ; v1(340,1620) LED96.1@340,1698.43 340,1707.14 391.29,1758.43 708.71,1758.43 760,1707.14 LED95.3@760,1698.43 LED94.1@940,1698.43 940,1707.14 991.29,1758.43 1308.71,1758.43 1360,1707.14 LED93.3@1360,1698.43 LED92.1@1540,1698.43 1540,1707.14 1591.29,1758.43 1908.71,1758.43 1960,1707.14 LED91.3@1960,1698.43 LED90.1@2140,1698.43 2140,1707.14 2191.29,1758.43 2508.71,1758.43 2560,1707.14 LED89.3@2560,1698.43 LED88.1@2740,1698.43 2740,1707.14 2791.29,1758.43 3108.71,1758.43 3160,1707.14 LED87.3@3160,1698.43 LED86.1@3340,1698.43 3340,1707.14 3391.29,1758.43 3708.71,1758.43 3760,1707.14 LED85.3@3760,1698.43 ; LED96.1@340,1718.43 ccw(c340,1745.67) 359.27,1726.41 ; LED96.1@347.5,1700.93 cw(c380.61,1700.93) 357.2,1724.34 ; LED96.1@357.5,1700.93 cw(c414.75,1700.93) 374.27,1741.41 ; 725.73,1741.41 cw(c685.25,1700.93) LED95.3@742.5,1700.93 ; 740.73,1726.41 ccw(c760,1745.67) LED95.3@760,1718.43 ; 742.8,1724.34 cw(c719.39,1700.93) LED95.3@752.5,1700.93 ; LED95.3@772.37,1686.05 cw(c802.25,1656.18) 802.25,1698.43 cw(c802.25,1740.67) LED95.3@772.37,1710.8 ; LED94.1@927.63,1686.05 ccw(c897.75,1656.18) 897.75,1698.43 ccw(c897.75,1740.67) LED94.1@927.63,1710.8 ; LED94.1@940,1718.43 ccw(c940,1745.67) 959.27,1726.41 ; LED94.1@947.5,1700.93 cw(c980.61,1700.93) 957.2,1724.34 ; LED94.1@957.5,1700.93 cw(c1014.75,1700.93) 974.27,1741.41 ; 1325.73,1741.41 cw(c1285.25,1700.93) LED93.3@1342.5,1700.93 ; 1340.73,1726.41 ccw(c1360,1745.67) LED93.3@1360,1718.43 ; 1342.8,1724.34 cw(c1319.39,1700.93) LED93.3@1352.5,1700.93 ; LED93.3@1372.37,1686.05 cw(c1402.25,1656.18) 1402.25,1698.43 cw(c1402.25,1740.67) LED93.3@1372.37,1710.8 ; LED92.1@1527.63,1686.05 ccw(c1497.75,1656.18) 1497.75,1698.43 ccw(c1497.75,1740.67) LED92.1@1527.63,1710.8 ; LED92.1@1540,1718.43 ccw(c1540,1745.67) 1559.27,1726.41 ; LED92.1@1547.5,1700.93 cw(c1580.61,1700.93) 1557.2,1724.34 ; LED92.1@1557.5,1700.93 cw(c1614.75,1700.93) 1574.27,1741.41 ; 1925.73,1741.41 cw(c1885.25,1700.93) LED91.3@1942.5,1700.93 ; 1940.73,1726.41 ccw(c1960,1745.67) LED91.3@1960,1718.43 ; 1942.8,1724.34 cw(c1919.39,1700.93) LED91.3@1952.5,1700.93 ; LED91.3@1972.37,1686.05 cw(c2002.25,1656.18) 2002.25,1698.43 cw(c2002.25,1740.67) LED91.3@1972.37,1710.8 ; LED90.1@2127.63,1686.05 ccw(c2097.75,1656.18) 2097.75,1698.43 ccw(c2097.75,1740.67) LED90.1@2127.63,1710.8 ; LED90.1@2140,1718.43 ccw(c2140,1745.67) 2159.27,1726.41 ; LED90.1@2147.5,1700.93 cw(c2180.61,1700.93) 2157.2,1724.34 ; LED90.1@2157.5,1700.93 cw(c2214.75,1700.93) 2174.27,1741.41 ; 2525.73,1741.41 cw(c2485.25,1700.93) LED89.3@2542.5,1700.93 ; 2540.73,1726.41 ccw(c2560,1745.67) LED89.3@2560,1718.43 ; 2542.8,1724.34 cw(c2519.39,1700.93) LED89.3@2552.5,1700.93 ; LED89.3@2572.37,1686.05 cw(c2602.25,1656.18) 2602.25,1698.43 cw(c2602.25,1740.67) LED89.3@2572.37,1710.8 ; LED88.1@2727.63,1686.05 ccw(c2697.75,1656.18) 2697.75,1698.43 ccw(c2697.75,1740.67) LED88.1@2727.63,1710.8 ; LED88.1@2740,1718.43 ccw(c2740,1745.67) 2759.27,1726.41 ; LED88.1@2747.5,1700.93 cw(c2780.61,1700.93) 2757.2,1724.34 ; LED88.1@2757.5,1700.93 cw(c2814.75,1700.93) 2774.27,1741.41 ; 3125.73,1741.41 cw(c3085.25,1700.93) LED87.3@3142.5,1700.93 ; 3140.73,1726.41 ccw(c3160,1745.67) LED87.3@3160,1718.43 ; 3142.8,1724.34 cw(c3119.39,1700.93) LED87.3@3152.5,1700.93 ; LED87.3@3172.37,1686.05 cw(c3202.25,1656.18) 3202.25,1698.43 cw(c3202.25,1740.67) LED87.3@3172.37,1710.8 ; LED86.1@3327.63,1686.05 ccw(c3297.75,1656.18) 3297.75,1698.43 ccw(c3297.75,1740.67) LED86.1@3327.63,1710.8 ; LED86.1@3340,1718.43 ccw(c3340,1745.67) 3359.27,1726.41 ; LED86.1@3347.5,1700.93 cw(c3380.61,1700.93) 3357.2,1724.34 ; LED86.1@3357.5,1700.93 cw(c3414.75,1700.93) 3374.27,1741.41 ; 3725.73,1741.41 cw(c3685.25,1700.93) LED85.3@3742.5,1700.93 ; 3740.73,1726.41 ccw(c3760,1745.67) LED85.3@3760,1718.43 ; 3742.8,1724.34 cw(c3719.39,1700.93) LED85.3@3752.5,1700.93
G9: LED97.3 LED98.1 LED99.3 LED100.1 LED101.3 LED102.1 LED103.3 LED104.1 LED105.3 LED106.1 LED107.3 LED108.1 R36.2 | length 6157.5
  Top Layer w10: v1(340,1320) 410,1380 R36.2@550,1400 ; v1@340.96,1332.46 ccw(c343.27,1362.55) 362.91,1339.64 ccw(c382.55,1316.73) v1@352.46,1319.04 ; R36.2@532,1413.5 cw(c488.54,1446.09) 496.23,1392.32 cw(c503.91,1338.54) R36.2@536.5,1382 ; R36.2@540,1407.5 cw(c515.86,1425.61) 520.13,1395.73 cw(c524.39,1365.86) R36.2@542.5,1390
  Bottom Layer w10: LED108.1@327.63,1383.55 cw(c297.75,1353.68) 340,1353.68 cw(c382.25,1353.68) LED108.1@352.37,1383.55 ; v1@331.16,1328.84 ccw(c309.82,1350.18) 340,1350.18 ccw(c370.18,1350.18) v1@348.84,1328.84 ; v1(340,1320) LED108.1@340,1398.43 340,1407.14 391.29,1458.43 708.71,1458.43 760,1407.14 LED107.3@760,1398.43 LED106.1@940,1398.43 940,1407.14 991.29,1458.43 1308.71,1458.43 1360,1407.14 LED105.3@1360,1398.43 LED104.1@1540,1398.43 1540,1407.14 1591.29,1458.43 1908.71,1458.43 1960,1407.14 LED103.3@1960,1398.43 LED102.1@2140,1398.43 2140,1407.14 2191.29,1458.43 2508.71,1458.43 2560,1407.14 LED101.3@2560,1398.43 LED100.1@2740,1398.43 2740,1407.14 2791.29,1458.43 3108.71,1458.43 3160,1407.14 LED99.3@3160,1398.43 LED98.1@3340,1398.43 3340,1407.14 3391.29,1458.43 3708.71,1458.43 3760,1407.14 LED97.3@3760,1398.43 ; LED108.1@340,1418.43 ccw(c340,1445.67) 359.27,1426.41 ; LED108.1@347.5,1400.93 cw(c380.61,1400.93) 357.2,1424.34 ; LED108.1@357.5,1400.93 cw(c414.75,1400.93) 374.27,1441.41 ; 725.73,1441.41 cw(c685.25,1400.93) LED107.3@742.5,1400.93 ; 740.73,1426.41 ccw(c760,1445.67) LED107.3@760,1418.43 ; 742.8,1424.34 cw(c719.39,1400.93) LED107.3@752.5,1400.93 ; LED107.3@772.37,1386.05 cw(c802.25,1356.18) 802.25,1398.43 cw(c802.25,1440.67) LED107.3@772.37,1410.8 ; LED106.1@927.63,1386.05 ccw(c897.75,1356.18) 897.75,1398.43 ccw(c897.75,1440.67) LED106.1@927.63,1410.8 ; LED106.1@940,1418.43 ccw(c940,1445.67) 959.27,1426.41 ; LED106.1@947.5,1400.93 cw(c980.61,1400.93) 957.2,1424.34 ; LED106.1@957.5,1400.93 cw(c1014.75,1400.93) 974.27,1441.41 ; 1325.73,1441.41 cw(c1285.25,1400.93) LED105.3@1342.5,1400.93 ; 1340.73,1426.41 ccw(c1360,1445.67) LED105.3@1360,1418.43 ; 1342.8,1424.34 cw(c1319.39,1400.93) LED105.3@1352.5,1400.93 ; LED105.3@1372.37,1386.05 cw(c1402.25,1356.18) 1402.25,1398.43 cw(c1402.25,1440.67) LED105.3@1372.37,1410.8 ; LED104.1@1527.63,1386.05 ccw(c1497.75,1356.18) 1497.75,1398.43 ccw(c1497.75,1440.67) LED104.1@1527.63,1410.8 ; LED104.1@1540,1418.43 ccw(c1540,1445.67) 1559.27,1426.41 ; LED104.1@1547.5,1400.93 cw(c1580.61,1400.93) 1557.2,1424.34 ; LED104.1@1557.5,1400.93 cw(c1614.75,1400.93) 1574.27,1441.41 ; 1925.73,1441.41 cw(c1885.25,1400.93) LED103.3@1942.5,1400.93 ; 1940.73,1426.41 ccw(c1960,1445.67) LED103.3@1960,1418.43 ; 1942.8,1424.34 cw(c1919.39,1400.93) LED103.3@1952.5,1400.93 ; LED103.3@1972.37,1386.05 cw(c2002.25,1356.18) 2002.25,1398.43 cw(c2002.25,1440.67) LED103.3@1972.37,1410.8 ; LED102.1@2127.63,1386.05 ccw(c2097.75,1356.18) 2097.75,1398.43 ccw(c2097.75,1440.67) LED102.1@2127.63,1410.8 ; LED102.1@2140,1418.43 ccw(c2140,1445.67) 2159.27,1426.41 ; LED102.1@2147.5,1400.93 cw(c2180.61,1400.93) 2157.2,1424.34 ; LED102.1@2157.5,1400.93 cw(c2214.75,1400.93) 2174.27,1441.41 ; 2525.73,1441.41 cw(c2485.25,1400.93) LED101.3@2542.5,1400.93 ; 2540.73,1426.41 ccw(c2560,1445.67) LED101.3@2560,1418.43 ; 2542.8,1424.34 cw(c2519.39,1400.93) LED101.3@2552.5,1400.93 ; LED101.3@2572.37,1386.05 cw(c2602.25,1356.18) 2602.25,1398.43 cw(c2602.25,1440.67) LED101.3@2572.37,1410.8 ; LED100.1@2727.63,1386.05 ccw(c2697.75,1356.18) 2697.75,1398.43 ccw(c2697.75,1440.67) LED100.1@2727.63,1410.8 ; LED100.1@2740,1418.43 ccw(c2740,1445.67) 2759.27,1426.41 ; LED100.1@2747.5,1400.93 cw(c2780.61,1400.93) 2757.2,1424.34 ; LED100.1@2757.5,1400.93 cw(c2814.75,1400.93) 2774.27,1441.41 ; 3125.73,1441.41 cw(c3085.25,1400.93) LED99.3@3142.5,1400.93 ; 3140.73,1426.41 ccw(c3160,1445.67) LED99.3@3160,1418.43 ; 3142.8,1424.34 cw(c3119.39,1400.93) LED99.3@3152.5,1400.93 ; LED99.3@3172.37,1386.05 cw(c3202.25,1356.18) 3202.25,1398.43 cw(c3202.25,1440.67) LED99.3@3172.37,1410.8 ; LED98.1@3327.63,1386.05 ccw(c3297.75,1356.18) 3297.75,1398.43 ccw(c3297.75,1440.67) LED98.1@3327.63,1410.8 ; LED98.1@3340,1418.43 ccw(c3340,1445.67) 3359.27,1426.41 ; LED98.1@3347.5,1400.93 cw(c3380.61,1400.93) 3357.2,1424.34 ; LED98.1@3357.5,1400.93 cw(c3414.75,1400.93) 3374.27,1441.41 ; 3725.73,1441.41 cw(c3685.25,1400.93) LED97.3@3742.5,1400.93 ; 3740.73,1426.41 ccw(c3760,1445.67) LED97.3@3760,1418.43 ; 3742.8,1424.34 cw(c3719.39,1400.93) LED97.3@3752.5,1400.93
G10: LED109.3 LED110.1 LED111.3 LED112.1 LED113.3 LED114.1 LED115.3 LED116.1 LED117.3 LED118.1 LED119.3 LED120.1 R37.1 | length 6157.5
  Top Layer w10: v1(340,1020) 410,1080 R37.1@550,1100 ; v1@340.96,1032.46 ccw(c343.27,1062.55) 362.91,1039.64 ccw(c382.55,1016.73) v1@352.46,1019.04 ; R37.1@532,1113.5 cw(c488.54,1146.09) 496.23,1092.32 cw(c503.91,1038.54) R37.1@536.5,1082 ; R37.1@540,1107.5 cw(c515.86,1125.61) 520.13,1095.73 cw(c524.39,1065.86) R37.1@542.5,1090
  Bottom Layer w10: LED120.1@327.63,1083.55 cw(c297.75,1053.68) 340,1053.68 cw(c382.25,1053.68) LED120.1@352.37,1083.55 ; v1@331.16,1028.84 ccw(c309.82,1050.18) 340,1050.18 ccw(c370.18,1050.18) v1@348.84,1028.84 ; v1(340,1020) LED120.1@340,1098.43 340,1107.14 391.29,1158.43 708.71,1158.43 760,1107.14 LED119.3@760,1098.43 LED118.1@940,1098.43 940,1107.14 991.29,1158.43 1308.71,1158.43 1360,1107.14 LED117.3@1360,1098.43 LED116.1@1540,1098.43 1540,1107.14 1591.29,1158.43 1908.71,1158.43 1960,1107.14 LED115.3@1960,1098.43 LED114.1@2140,1098.43 2140,1107.14 2191.29,1158.43 2508.71,1158.43 2560,1107.14 LED113.3@2560,1098.43 LED112.1@2740,1098.43 2740,1107.14 2791.29,1158.43 3108.71,1158.43 3160,1107.14 LED111.3@3160,1098.43 LED110.1@3340,1098.43 3340,1107.14 3391.29,1158.43 3708.71,1158.43 3760,1107.14 LED109.3@3760,1098.43 ; LED120.1@340,1118.43 ccw(c340,1145.67) 359.27,1126.41 ; LED120.1@347.5,1100.93 cw(c380.61,1100.93) 357.2,1124.34 ; LED120.1@357.5,1100.93 cw(c414.75,1100.93) 374.27,1141.41 ; 725.73,1141.41 cw(c685.25,1100.93) LED119.3@742.5,1100.93 ; 740.73,1126.41 ccw(c760,1145.67) LED119.3@760,1118.43 ; 742.8,1124.34 cw(c719.39,1100.93) LED119.3@752.5,1100.93 ; LED119.3@772.37,1086.05 cw(c802.25,1056.18) 802.25,1098.43 cw(c802.25,1140.67) LED119.3@772.37,1110.8 ; LED118.1@927.63,1086.05 ccw(c897.75,1056.18) 897.75,1098.43 ccw(c897.75,1140.67) LED118.1@927.63,1110.8 ; LED118.1@940,1118.43 ccw(c940,1145.67) 959.27,1126.41 ; LED118.1@947.5,1100.93 cw(c980.61,1100.93) 957.2,1124.34 ; LED118.1@957.5,1100.93 cw(c1014.75,1100.93) 974.27,1141.41 ; 1325.73,1141.41 cw(c1285.25,1100.93) LED117.3@1342.5,1100.93 ; 1340.73,1126.41 ccw(c1360,1145.67) LED117.3@1360,1118.43 ; 1342.8,1124.34 cw(c1319.39,1100.93) LED117.3@1352.5,1100.93 ; LED117.3@1372.37,1086.05 cw(c1402.25,1056.18) 1402.25,1098.43 cw(c1402.25,1140.67) LED117.3@1372.37,1110.8 ; LED116.1@1527.63,1086.05 ccw(c1497.75,1056.18) 1497.75,1098.43 ccw(c1497.75,1140.67) LED116.1@1527.63,1110.8 ; LED116.1@1540,1118.43 ccw(c1540,1145.67) 1559.27,1126.41 ; LED116.1@1547.5,1100.93 cw(c1580.61,1100.93) 1557.2,1124.34 ; LED116.1@1557.5,1100.93 cw(c1614.75,1100.93) 1574.27,1141.41 ; 1925.73,1141.41 cw(c1885.25,1100.93) LED115.3@1942.5,1100.93 ; 1940.73,1126.41 ccw(c1960,1145.67) LED115.3@1960,1118.43 ; 1942.8,1124.34 cw(c1919.39,1100.93) LED115.3@1952.5,1100.93 ; LED115.3@1972.37,1086.05 cw(c2002.25,1056.18) 2002.25,1098.43 cw(c2002.25,1140.67) LED115.3@1972.37,1110.8 ; LED114.1@2127.63,1086.05 ccw(c2097.75,1056.18) 2097.75,1098.43 ccw(c2097.75,1140.67) LED114.1@2127.63,1110.8 ; LED114.1@2140,1118.43 ccw(c2140,1145.67) 2159.27,1126.41 ; LED114.1@2147.5,1100.93 cw(c2180.61,1100.93) 2157.2,1124.34 ; LED114.1@2157.5,1100.93 cw(c2214.75,1100.93) 2174.27,1141.41 ; 2525.73,1141.41 cw(c2485.25,1100.93) LED113.3@2542.5,1100.93 ; 2540.73,1126.41 ccw(c2560,1145.67) LED113.3@2560,1118.43 ; 2542.8,1124.34 cw(c2519.39,1100.93) LED113.3@2552.5,1100.93 ; LED113.3@2572.37,1086.05 cw(c2602.25,1056.18) 2602.25,1098.43 cw(c2602.25,1140.67) LED113.3@2572.37,1110.8 ; LED112.1@2727.63,1086.05 ccw(c2697.75,1056.18) 2697.75,1098.43 ccw(c2697.75,1140.67) LED112.1@2727.63,1110.8 ; LED112.1@2740,1118.43 ccw(c2740,1145.67) 2759.27,1126.41 ; LED112.1@2747.5,1100.93 cw(c2780.61,1100.93) 2757.2,1124.34 ; LED112.1@2757.5,1100.93 cw(c2814.75,1100.93) 2774.27,1141.41 ; 3125.73,1141.41 cw(c3085.25,1100.93) LED111.3@3142.5,1100.93 ; 3140.73,1126.41 ccw(c3160,1145.67) LED111.3@3160,1118.43 ; 3142.8,1124.34 cw(c3119.39,1100.93) LED111.3@3152.5,1100.93 ; LED111.3@3172.37,1086.05 cw(c3202.25,1056.18) 3202.25,1098.43 cw(c3202.25,1140.67) LED111.3@3172.37,1110.8 ; LED110.1@3327.63,1086.05 ccw(c3297.75,1056.18) 3297.75,1098.43 ccw(c3297.75,1140.67) LED110.1@3327.63,1110.8 ; LED110.1@3340,1118.43 ccw(c3340,1145.67) 3359.27,1126.41 ; LED110.1@3347.5,1100.93 cw(c3380.61,1100.93) 3357.2,1124.34 ; LED110.1@3357.5,1100.93 cw(c3414.75,1100.93) 3374.27,1141.41 ; 3725.73,1141.41 cw(c3685.25,1100.93) LED109.3@3742.5,1100.93 ; 3740.73,1126.41 ccw(c3760,1145.67) LED109.3@3760,1118.43 ; 3742.8,1124.34 cw(c3719.39,1100.93) LED109.3@3752.5,1100.93
G11: LED121.3 LED122.1 LED123.3 LED124.1 LED125.3 LED126.1 LED127.3 LED128.1 LED129.3 LED130.1 LED131.3 LED132.1 R40.1 | length 6157.5
  Top Layer w10: v1(340,720) 410,780 R40.1@550,800 ; v1@340.96,732.46 ccw(c343.27,762.55) 362.91,739.64 ccw(c382.55,716.73) v1@352.46,719.04 ; R40.1@532,813.5 cw(c488.54,846.09) 496.23,792.32 cw(c503.91,738.54) R40.1@536.5,782 ; R40.1@540,807.5 cw(c515.86,825.61) 520.13,795.73 cw(c524.39,765.86) R40.1@542.5,790
  Bottom Layer w10: LED132.1@327.63,783.55 cw(c297.75,753.68) 340,753.68 cw(c382.25,753.68) LED132.1@352.37,783.55 ; v1@331.16,728.84 ccw(c309.82,750.18) 340,750.18 ccw(c370.18,750.18) v1@348.84,728.84 ; v1(340,720) LED132.1@340,798.43 340,807.14 391.29,858.43 708.71,858.43 760,807.14 LED131.3@760,798.43 LED130.1@940,798.43 940,807.14 991.29,858.43 1308.71,858.43 1360,807.14 LED129.3@1360,798.43 LED128.1@1540,798.43 1540,807.14 1591.29,858.43 1908.71,858.43 1960,807.14 LED127.3@1960,798.43 LED126.1@2140,798.43 2140,807.14 2191.29,858.43 2508.71,858.43 2560,807.14 LED125.3@2560,798.43 LED124.1@2740,798.43 2740,807.14 2791.29,858.43 3108.71,858.43 3160,807.14 LED123.3@3160,798.43 LED122.1@3340,798.43 3340,807.14 3391.29,858.43 3708.71,858.43 3760,807.14 LED121.3@3760,798.43 ; LED132.1@340,818.43 ccw(c340,845.67) 359.27,826.41 ; LED132.1@347.5,800.93 cw(c380.61,800.93) 357.2,824.34 ; LED132.1@357.5,800.93 cw(c414.75,800.93) 374.27,841.41 ; 725.73,841.41 cw(c685.25,800.93) LED131.3@742.5,800.93 ; 740.73,826.41 ccw(c760,845.67) LED131.3@760,818.43 ; 742.8,824.34 cw(c719.39,800.93) LED131.3@752.5,800.93 ; LED131.3@772.37,786.05 cw(c802.25,756.18) 802.25,798.43 cw(c802.25,840.67) LED131.3@772.37,810.8 ; LED130.1@927.63,786.05 ccw(c897.75,756.18) 897.75,798.43 ccw(c897.75,840.67) LED130.1@927.63,810.8 ; LED130.1@940,818.43 ccw(c940,845.67) 959.27,826.41 ; LED130.1@947.5,800.93 cw(c980.61,800.93) 957.2,824.34 ; LED130.1@957.5,800.93 cw(c1014.75,800.93) 974.27,841.41 ; 1325.73,841.41 cw(c1285.25,800.93) LED129.3@1342.5,800.93 ; 1340.73,826.41 ccw(c1360,845.67) LED129.3@1360,818.43 ; 1342.8,824.34 cw(c1319.39,800.93) LED129.3@1352.5,800.93 ; LED129.3@1372.37,786.05 cw(c1402.25,756.18) 1402.25,798.43 cw(c1402.25,840.67) LED129.3@1372.37,810.8 ; LED128.1@1527.63,786.05 ccw(c1497.75,756.18) 1497.75,798.43 ccw(c1497.75,840.67) LED128.1@1527.63,810.8 ; LED128.1@1540,818.43 ccw(c1540,845.67) 1559.27,826.41 ; LED128.1@1547.5,800.93 cw(c1580.61,800.93) 1557.2,824.34 ; LED128.1@1557.5,800.93 cw(c1614.75,800.93) 1574.27,841.41 ; 1925.73,841.41 cw(c1885.25,800.93) LED127.3@1942.5,800.93 ; 1940.73,826.41 ccw(c1960,845.67) LED127.3@1960,818.43 ; 1942.8,824.34 cw(c1919.39,800.93) LED127.3@1952.5,800.93 ; LED127.3@1972.37,786.05 cw(c2002.25,756.18) 2002.25,798.43 cw(c2002.25,840.67) LED127.3@1972.37,810.8 ; LED126.1@2127.63,786.05 ccw(c2097.75,756.18) 2097.75,798.43 ccw(c2097.75,840.67) LED126.1@2127.63,810.8 ; LED126.1@2140,818.43 ccw(c2140,845.67) 2159.27,826.41 ; LED126.1@2147.5,800.93 cw(c2180.61,800.93) 2157.2,824.34 ; LED126.1@2157.5,800.93 cw(c2214.75,800.93) 2174.27,841.41 ; 2525.73,841.41 cw(c2485.25,800.93) LED125.3@2542.5,800.93 ; 2540.73,826.41 ccw(c2560,845.67) LED125.3@2560,818.43 ; 2542.8,824.34 cw(c2519.39,800.93) LED125.3@2552.5,800.93 ; LED125.3@2572.37,786.05 cw(c2602.25,756.18) 2602.25,798.43 cw(c2602.25,840.67) LED125.3@2572.37,810.8 ; LED124.1@2727.63,786.05 ccw(c2697.75,756.18) 2697.75,798.43 ccw(c2697.75,840.67) LED124.1@2727.63,810.8 ; LED124.1@2740,818.43 ccw(c2740,845.67) 2759.27,826.41 ; LED124.1@2747.5,800.93 cw(c2780.61,800.93) 2757.2,824.34 ; LED124.1@2757.5,800.93 cw(c2814.75,800.93) 2774.27,841.41 ; 3125.73,841.41 cw(c3085.25,800.93) LED123.3@3142.5,800.93 ; 3140.73,826.41 ccw(c3160,845.67) LED123.3@3160,818.43 ; 3142.8,824.34 cw(c3119.39,800.93) LED123.3@3152.5,800.93 ; LED123.3@3172.37,786.05 cw(c3202.25,756.18) 3202.25,798.43 cw(c3202.25,840.67) LED123.3@3172.37,810.8 ; LED122.1@3327.63,786.05 ccw(c3297.75,756.18) 3297.75,798.43 ccw(c3297.75,840.67) LED122.1@3327.63,810.8 ; LED122.1@3340,818.43 ccw(c3340,845.67) 3359.27,826.41 ; LED122.1@3347.5,800.93 cw(c3380.61,800.93) 3357.2,824.34 ; LED122.1@3357.5,800.93 cw(c3414.75,800.93) 3374.27,841.41 ; 3725.73,841.41 cw(c3685.25,800.93) LED121.3@3742.5,800.93 ; 3740.73,826.41 ccw(c3760,845.67) LED121.3@3760,818.43 ; 3742.8,824.34 cw(c3719.39,800.93) LED121.3@3752.5,800.93